# Altium PCB 844-XXXXX_FAB_NEO-M9N_MODULE.PcbDoc
Units mm, origin at the board's own origin, x right, y up, seen from the top; angles counter-clockwise.
Board outline 67.18 x 31.75 mm, 4 copper layers (L01-Top Layer, L02-Inner Layer, L03-Inner Layer, L04-Bottom Layer), stack 1.555 mm thick; 33 components, 25 nets, 85 pads, 211 vias.
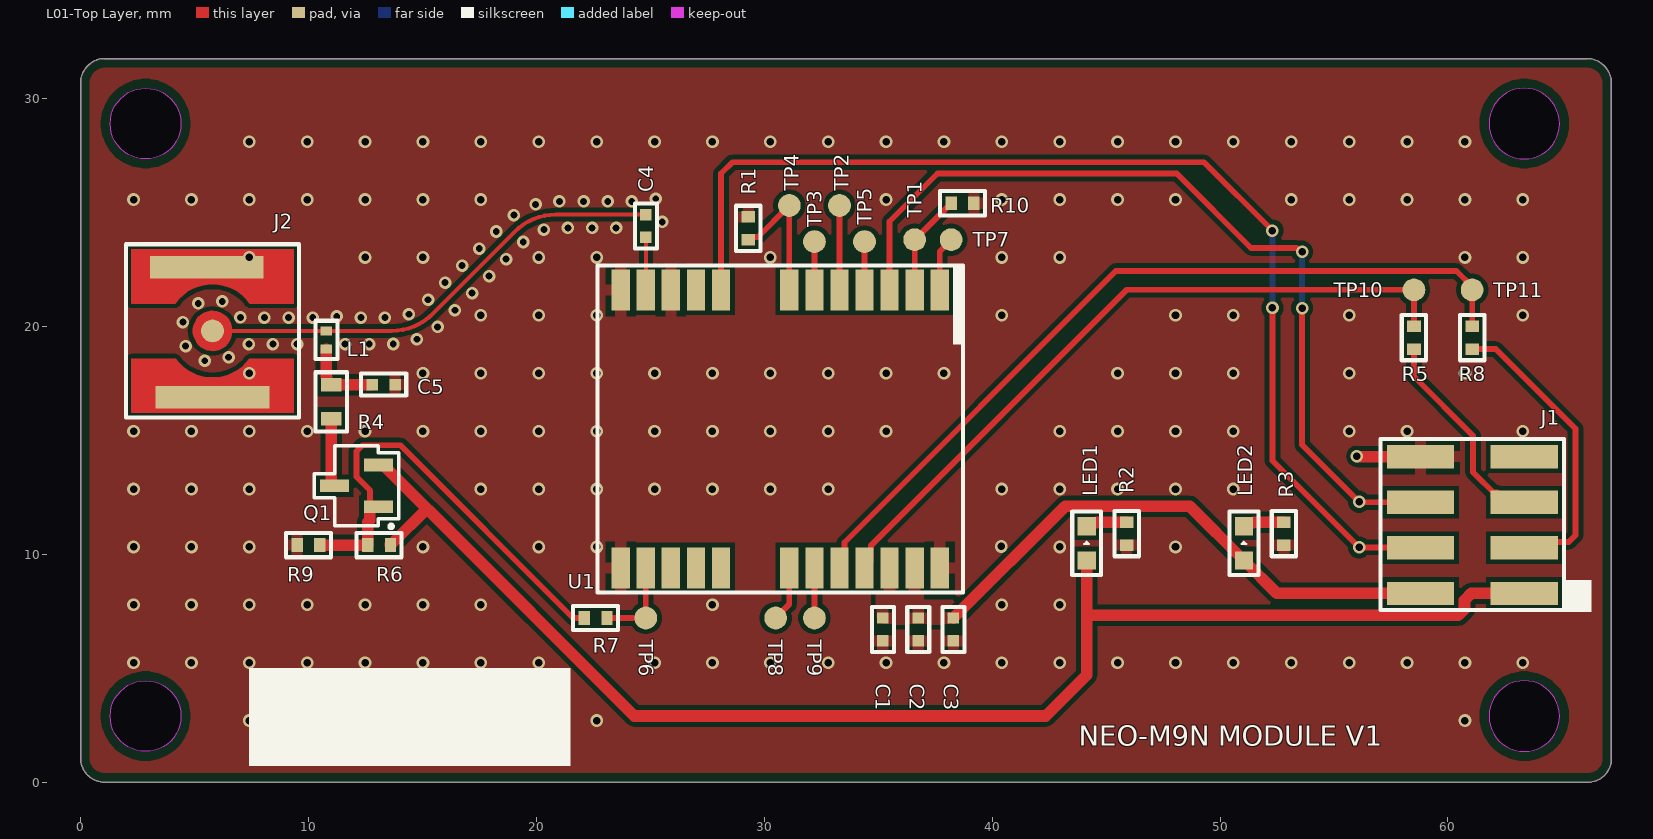
[diagram p0: L01-Top Layer view]
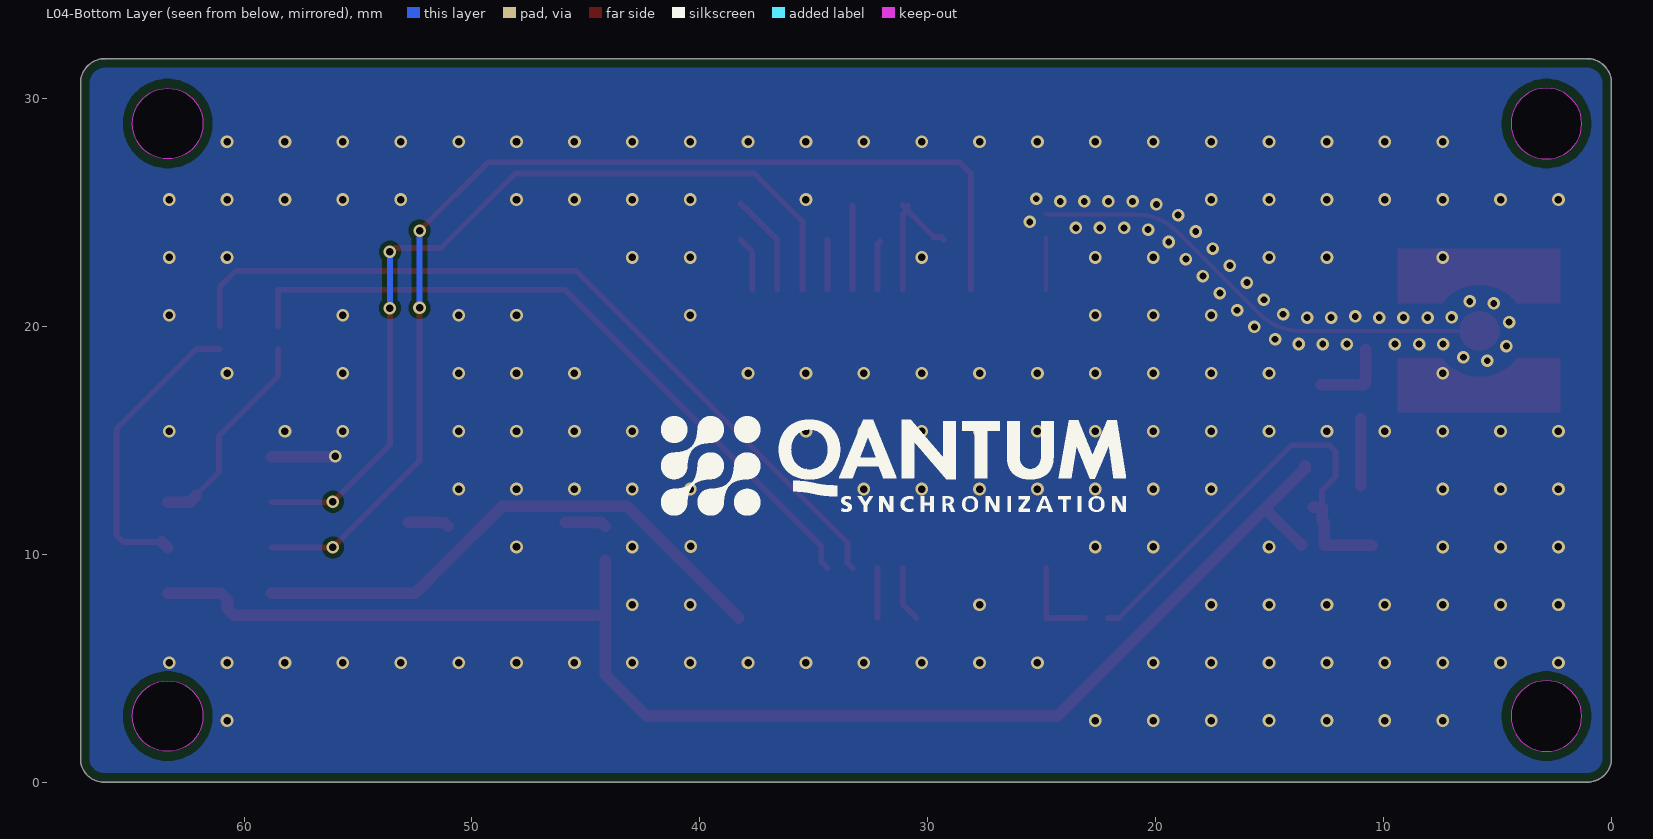
[diagram p1: L04-Bottom Layer view, seen from below]
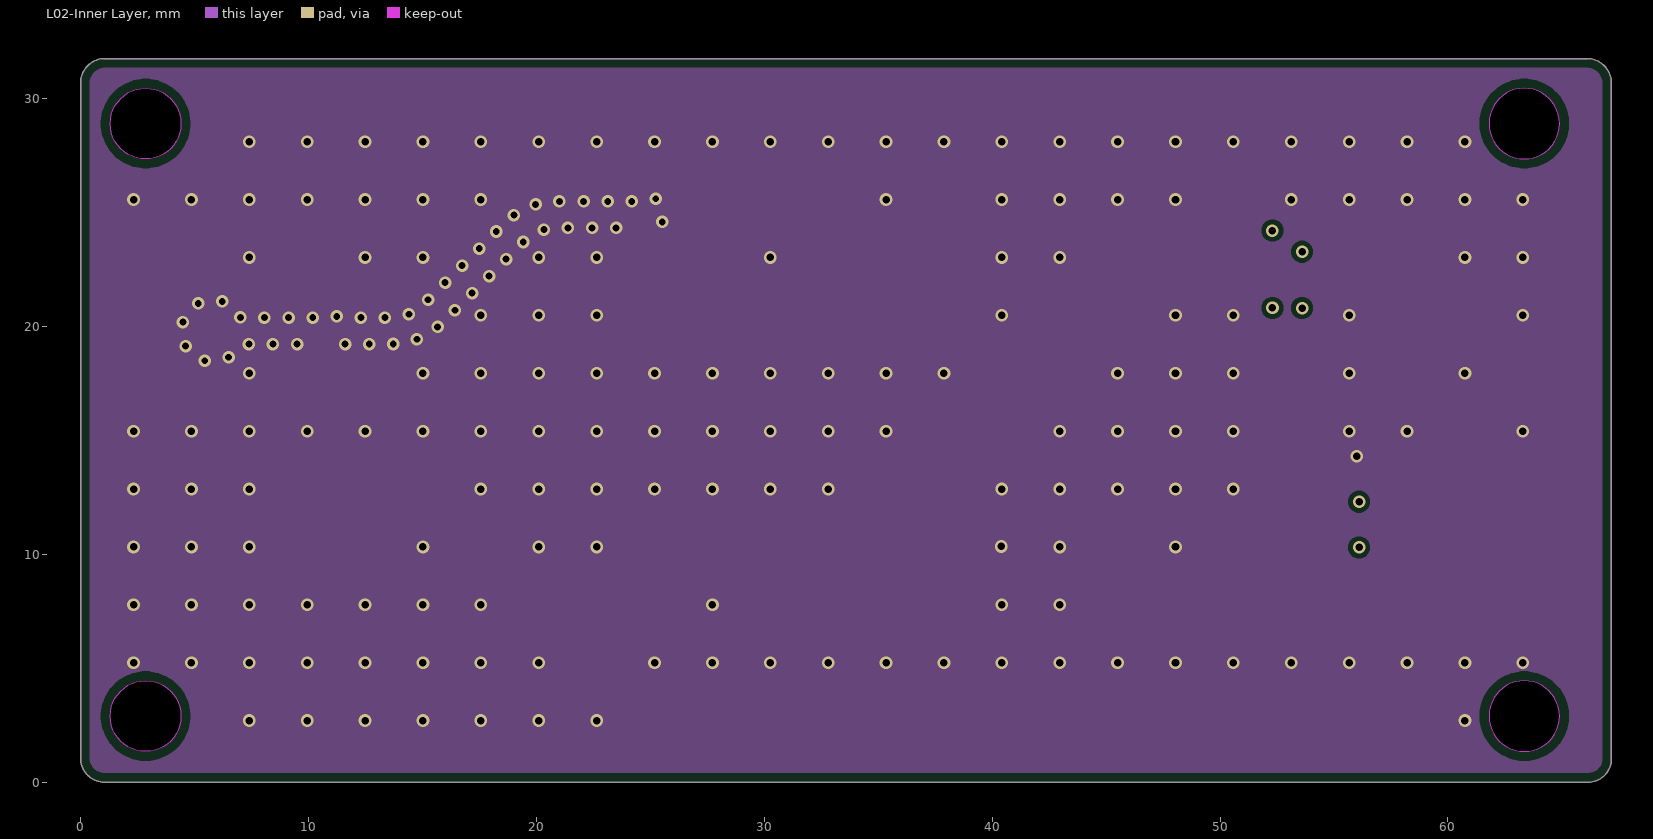
[diagram p2: L02-Inner Layer]
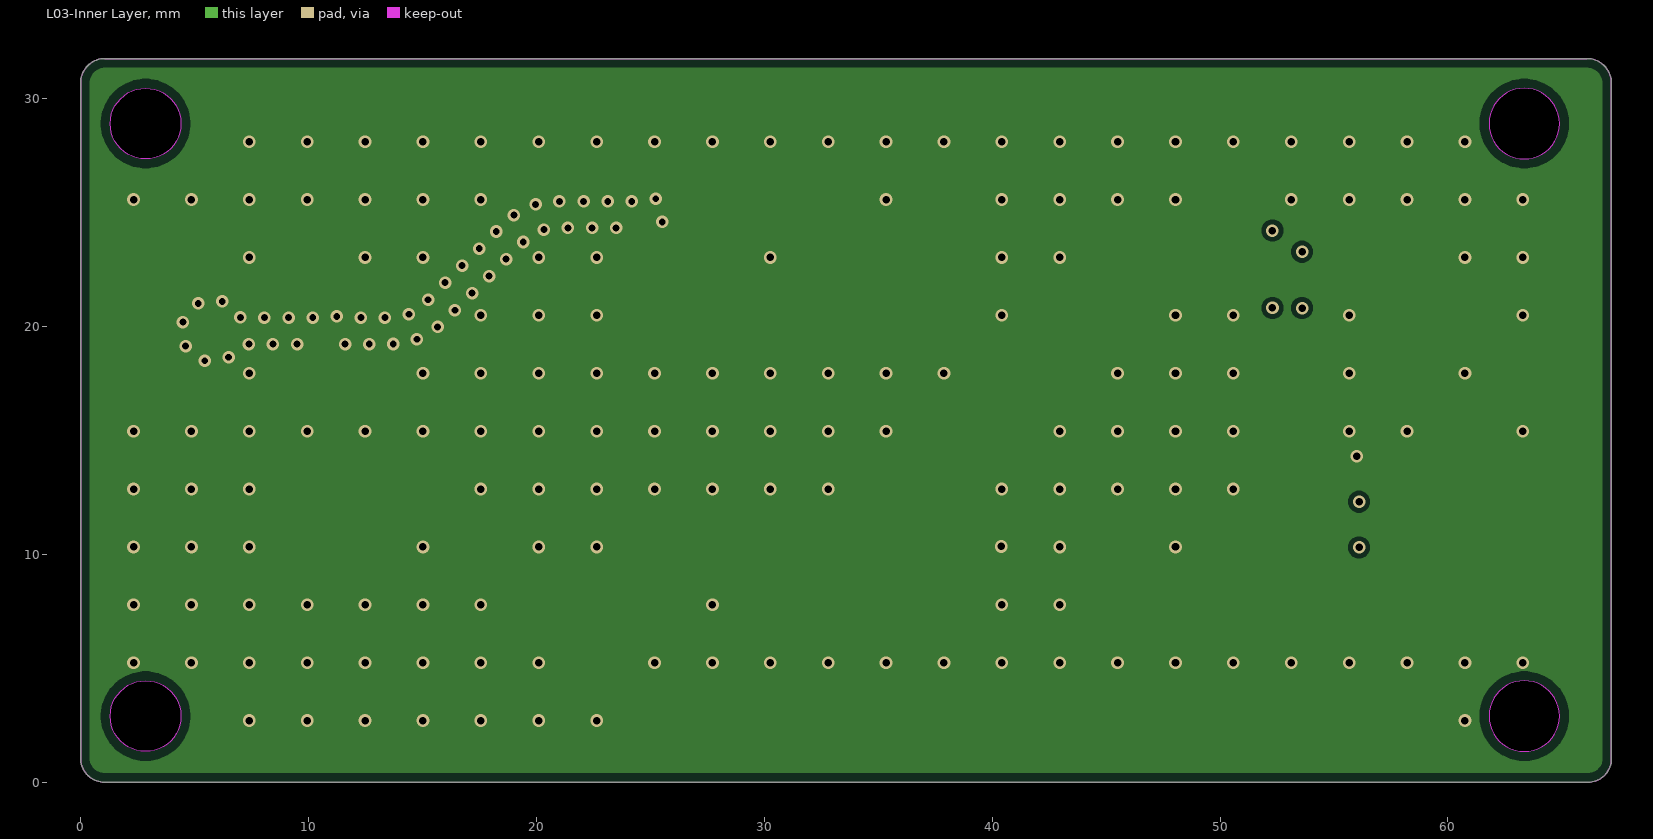
[diagram p3: L03-Inner Layer]
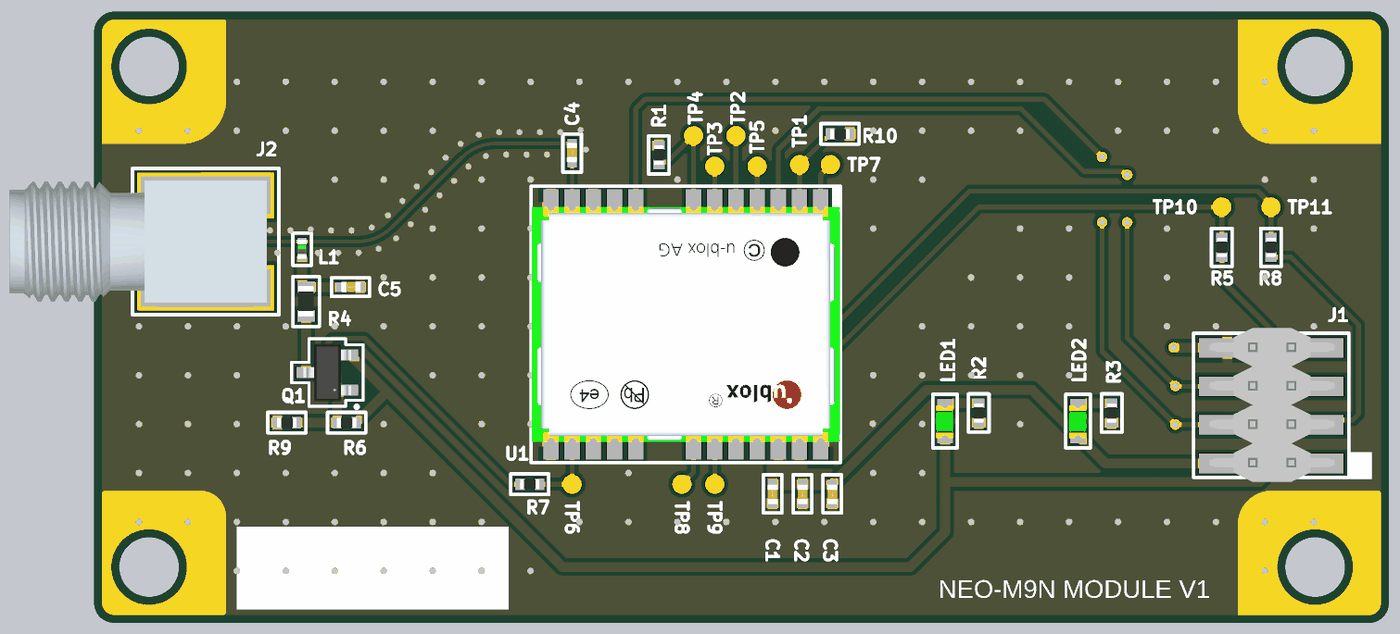
[diagram p4: 3D render of the assembled board from above, using the file's embedded part models]

## Layer stack, top to bottom
Top Solder: solder mask 0.0152, Solder Resist, Dk 3.9
L01-Top Layer: signal copper 0.0457
Dielectric 1: prepreg 0.1046, 2x106, Dk 3.7
L02-Inner Layer: signal copper 0.0305
Dielectric 2: core 1.1938, FR4, Dk 4.04
L03-Inner Layer: signal copper 0.0305
Dielectric 3: prepreg 0.1046, 2x106, Dk 3.7
L04-Bottom Layer: signal copper 0.0457
Bottom Solder: solder mask 0.0152, Solder Resist, Dk 3.9

## Board outline
1.045,0 cw(c1.045,1.045) 0,1.045 -0.002,30.676 cw(c1.069,30.676) 1.068,31.747 66.094,31.749 cw(c66.094,30.669) 67.174,30.67 67.171,1.015 cw(c66.152,1.015) 66.153,-0.004
cut-out: 61.801,2.896 ccw(c63.351,2.896) 63.351,1.346 ccw(c63.351,2.896) 64.901,2.896 ccw(c63.351,2.896) 63.351,4.446 ccw(c63.351,2.896)
cut-out: 1.301,2.896 cw(c2.851,2.896) 2.851,4.446 cw(c2.851,2.896) 4.401,2.896 cw(c2.851,2.896) 2.851,1.346 cw(c2.851,2.896)
cut-out: 61.801,28.896 ccw(c63.351,28.896) 63.351,27.346 ccw(c63.351,28.896) 64.901,28.896 ccw(c63.351,28.896) 63.351,30.446 ccw(c63.351,28.896)
cut-out: 2.851,27.346 cw(c2.851,28.896) 1.301,28.896 cw(c2.851,28.896) 2.851,30.446 cw(c2.851,28.896) 4.401,28.896 cw(c2.851,28.896)

## Design rules (kind name [scope] priority, off if disabled: settings)
AcuteAngle [All] p1: minimum=6.00000000000000E+0001 checktracksonly=FALSE
BoardOutlineClearance [All] p1: gap=0.4 ignorepadtopadclearanceinfootprint=FALSE
Clearance Clearance_L1andL4_Copper [(InPolygon AND (OnLayer('Top Layer') OR OnLayer('Bottom Layer'))) vs (InDifferentialPairClass('All Differential Pairs'))] p1: gap=0.2 ignorepadtopadclearanceinfootprint=FALSE except(0.3: Arc-Hole Track-Hole SMDPad-Hole THPad-Hole Via-Hole Fill-Hole Poly-Hole Region-Hole Text-Hole; 0.5: Arc-Fill Arc-Poly Arc-Region Track-Fill Track-Poly Track-Region SMDPad-Fill SMDPad-Poly SMDPad-Region THPad-Fill THPad-Poly THPad-Region Via-Fill Via-Poly Via-Region Fill-Fill Fill-Poly Fill-Region Poly-Poly Poly-Region Region-Region)
Clearance [All] p2: gap=0.2 ignorepadtopadclearanceinfootprint=FALSE
ComponentClearance [All] p1: gap=0.4 collisioncheckmode=3 verticalgap=0.5 showdistances=FALSE
DiffPairsRouting 90_Ohm_L1andL4 [InDifferentialPairClass('90_Ohm')] p1: maxlimit=0.254 minlimit=0.14 mostfreqgap=0.254 toplayer_maxgap=0.14 toplayer_prefgap=0.14 toplayer_minwidth=0.114 toplayer_maxwidth=0.114 toplayer_prefwidth=0.114 midlayer1_mingap=0.254 midlayer1_minwidth=0.381 midlayer1_maxwidth=0.381 midlayer1_prefwidth=0.381 midlayer2_mingap=0.254 midlayer2_minwidth=0.381 midlayer2_maxwidth=0.381 midlayer2_prefwidth=0.381 bottomlayer_maxgap=0.14 bottomlayer_prefgap=0.14 bottomlayer_minwidth=0.114 bottomlayer_maxwidth=0.114 bottomlayer_prefwidth=0.114 maxuncoupledlength=5.08
DiffPairsRouting 100_Ohm_L1andL4 [InDifferentialPairClass('100_Ohm')] p2: maxlimit=0.254 minlimit=0.241 mostfreqgap=0.254 toplayer_maxgap=0.241 toplayer_prefgap=0.241 toplayer_minwidth=0.114 toplayer_maxwidth=0.114 toplayer_prefwidth=0.114 midlayer1_mingap=0.254 midlayer1_minwidth=0.381 midlayer1_maxwidth=0.381 midlayer1_prefwidth=0.381 midlayer2_mingap=0.254 midlayer2_minwidth=0.381 midlayer2_maxwidth=0.381 midlayer2_prefwidth=0.381 bottomlayer_maxgap=0.241 bottomlayer_prefgap=0.241 bottomlayer_minwidth=0.114 bottomlayer_maxwidth=0.114 bottomlayer_prefwidth=0.114 maxuncoupledlength=5.08
DiffPairsRouting 100_Ohm_Default [All] p3: maxlimit=0.254 minlimit=0.241 mostfreqgap=0.254 toplayer_maxgap=0.241 toplayer_prefgap=0.241 toplayer_minwidth=0.114 toplayer_maxwidth=0.114 toplayer_prefwidth=0.114 midlayer1_mingap=0.254 midlayer1_minwidth=0.381 midlayer1_maxwidth=0.381 midlayer1_prefwidth=0.381 midlayer2_mingap=0.254 midlayer2_minwidth=0.381 midlayer2_maxwidth=0.381 midlayer2_prefwidth=0.381 bottomlayer_maxgap=0.241 bottomlayer_prefgap=0.241 bottomlayer_minwidth=0.114 bottomlayer_maxwidth=0.114 bottomlayer_prefwidth=0.114 maxuncoupledlength=5.08
HoleSize [All] p1: absolutevalues=TRUE maxlimit=3 minlimit=0.15 maxpercent=80.000 minpercent=20.000
HoleToHoleClearance [All] p1: gap=0.3 allowstackedmicrovias=TRUE
MatchedLengths [InDifferentialPairClass('All Differential Pairs')] p1: tolerance=0.025 checknetsindiffpair=TRUE checkdiffpairvsdiffpair=FALSE checkxsignals=FALSE checkothers=FALSE
MinimumSolderMaskSliver [All] p1: minsoldermaskwidth=0.1 // 0.076mm for Green Soldermask, 0.1 for other color soldermask
PlaneClearance [All] p1: clearance=0.254
PolygonConnect [All] p1: thpad.connectstyle=Relief thpad.reliefconductorwidth=0.508 thpad.reliefentries=4 thpad.polygonreliefangle="90 Angle" thpad.airgapwidth=0.254 smdpad.connectstyle=Relief smdpad.reliefconductorwidth=0.508 smdpad.reliefentries=4 smdpad.polygonreliefangle="90 Angle" smdpad.airgapwidth=0.254 via.connectstyle=Direct via.reliefconductorwidth=0.254 via.reliefentries=4 via.polygonreliefangle="90 Angle" via.airgapwidth=0.254
RoutingCorners [All] p1: cornerstyle=45-Degree minsetback=2.5 maxsetback=2.5
RoutingVias [All] p1: holewidth=0.2 width=0.4 viastyle="Through Hole" minholewidth=0.15 minwidth=0.35 maxholewidth=0.3 maxwidth=0.6
SilkToSilkClearance [All] p1: silktosilkclearance=0.1
SilkToSolderMaskClearance [IsPad] p1: minsilkscreentomaskgap=1 clearancetoexposedcopper=TRUE
SolderMaskExpansion [All] p1: expansion=0.05 istentingtop=FALSE
UnRoutedNet [All] p1: checkbadconnections=TRUE
Width Width_PWR [InNetClass('PWR')] p1: maxlimit=0.5 minlimit=0.2 preferedwidth=0.3 minimp=50.000000 maximp=50.000000 favimp=50.000000
Width Width_GND [InNetClass('GND')] p2: maxlimit=0.5 minlimit=0.2 preferedwidth=0.3 minimp=50.000000 maximp=50.000000 favimp=50.000000
20 further rules are at their usual default settings.

## Components (designator, comment, footprint, x,y, rotation, side; value= is the part's Value field where it differs from the comment)
C1 "1uF 6V3 0402" c0402 35.2,6.7 r90 top
C2 "100nF 10V 0402" c0402 36.756,6.7 r90 top
C3 "10nF 50V 0402" c0402 38.299,6.7 r90 top
C4 "47pF 50V 0402" c0402 24.801,24.4 r270 top
C5 "10nF 50V 0402" c0402 13.3,17.438 r180 top
J1 "NRPN042MAMS-RC 2MM" CONN_NRPN042MAMS-RC 63.345,8.28 r180 top locked
J2 "SMB_131-3711-301" CONN_131-3711-301 5.79,19.8 r270 top locked
L1 "27nH 300mA 460mohm 0402" L0402 10.788,19.4 r90 top
LED1 "Green" led0603 44.149,10.475 r90 top
LED2 "Green" led0603 51.049,10.475 r90 top
Q1 "DMG2302UKQ-7" SOT23 12.1,13 r90 top
R1 "0 ohm 0402" r0402 29.3,24.3 r90 top
R2 "10K 1/8W 0402" r0402 45.9,10.9 r90 top
R3 "10K 1/8W 0402" r0402 52.8,10.9 r90 top
R4 "10 OHM 1/4W 0603" r0603 11,16.688 r90 top
R5 "0 ohm 0402" r0402 58.506,19.5 r270 top
R6 "0 ohm 0402" r0402 13.1,10.4 r0 top
R7 "0 ohm 0402" r0402 22.6,7.2 r180 top
R8 "0 ohm 0402" r0402 61.061,19.5 r270 top
R9 "0 ohm 0402" r0402 10,10.4 r180 top
R10 "0 ohm 0402" r0402 38.7,25.4 r180 top
TP1 "1MM" TP1MM 36.6,23.8 r0 top
TP2 "1MM" TP1MM 33.3,25.3 r0 top
TP3 "1MM" TP1MM 32.2,23.715 r0 top
TP4 "1MM" TP1MM 31.1,25.3 r0 top
TP5 "1MM" TP1MM 34.4,23.715 r0 top
TP6 "1MM" TP1MM 24.8,7.2 r0 top
TP7 "1MM" TP1MM 38.2,23.8 r0 top
TP8 "1MM" TP1MM 30.5,7.2 r0 top
TP9 "1MM" TP1MM 32.2,7.2 r0 top
TP10 "1MM" TP1MM 58.506,21.6 r90 top
TP11 "1MM" TP1MM 61.061,21.6 r90 top
U1 "NEO-M9N-00B" IC_NEO-M9N 30.7,15.5 r90 top

## Footprints (in the part's own frame and the unit in brackets; to place one, negate y for a bottom-side part, rotate by r counter-clockwise, add the part's x,y. Pads: shape width x height; smd on the part's side, far side on the other; paste and mask are expansions set on the pad)
c0402 [mm]
  rect 0.5x0.5 smd: 1(-0.5,0) 2(0.5,0)
  silkscreen extent -0.99,-0.48 0.99,0.48, body extent -0.55,-0.28 0.5,0.27, height 0.56
CONN_131-3711-301 [mm]
  round 1 smd mask+0: 1(0,0)
  rect 1x5 smd mask+0: 2(-2.794,-0.254) 3(2.916,0)
  L01-Top Layer circle w0.013: c0,0 r0.864
  L01-Top Layer region: 1.219,-3.556 3.581,-3.556 3.581,3.556 1.219,3.556 1.219,1.642 1.827,0.919 2.045,0 1.827,-0.918 1.219,-1.641 1.219,-1.641
  L01-Top Layer region: -3.581,-3.556 -1.219,-3.556 -1.219,-1.641 -1.827,-0.918 -2.045,0 -1.827,0.919 -1.219,1.642 -1.219,1.642 -1.219,3.556 -3.581,3.556
  L01-Top Layer region: -0.864,0 -0.798,-0.33 -0.611,-0.61 -0.33,-0.798 0,-0.863 0,-0.863 0.331,-0.798 0.611,-0.61 0.798,-0.33 0.864,0 0.864,0 0.798,0.331 0.611,0.611 0.331,0.798 0,0.864 0,0.864 -0.33,0.798 -0.611,0.611 -0.798,0.331 -0.864,0
  L01-Top Layer lines w0.013: 3.581,-3.556 1.219,-3.556 1.219,-1.641 ccw(c0,0) 1.219,1.642 1.219,3.556 3.581,3.556 3.581,-3.556 ; -1.219,-3.556 -3.581,-3.556 -3.581,3.556 -1.219,3.556 -1.219,1.642 ccw(c0,0) -1.219,-1.641 -1.219,-3.556
  silkscreen extent -3.8,-3.8 3.8,3.8, body extent -3.18,-10.16 3.18,3.18, height 8.27
CONN_NRPN042MAMS-RC [mm] "MALE_P2MM_8POS_2ROW"
  rect 2.95x1.02 smd: 1(0,0) 2(4.55,0) 3(0,-2) 4(4.55,-2) 5(0,-4) 6(4.55,-4) 7(0,-6) 8(4.55,-6)
  silkscreen extent -2.95,-6.77 6.3,0.81, body extent -1.02,-7.05 5.48,0.95, height 5.81
IC_NEO-M9N [mil]
  rect 70.8x31.5 smd paste-99999: 1(240.15,-275.55) 2(240.15,-232.25) 3(240.15,-188.95) 4(240.15,-145.65) 5(240.15,-102.35) 6(240.15,-59.05) 7(240.15,-15.75) 8(240.15,102.35) 9(240.15,145.65) 10(240.15,188.95) 11(240.15,232.25) 12(240.15,275.55) 13(-240.15,275.55) 14(-240.15,232.25) 15(-240.15,188.95) 16(-240.15,145.65) 17(-240.15,102.35) 18(-240.15,-15.75) 19(-240.15,-59.05) 20(-240.15,-102.35) 21(-240.15,-145.65) 22(-240.15,-188.95) 23(-240.15,-232.25) 24(-240.15,-275.55)
  silkscreen extent -282,-316 282,316, body extent -240,-315 240,315, height 91
L0402 [mm]
  rect 0.4x0.5 smd: 1(-0.4,0) 2(0.4,0)
  silkscreen extent -0.83,-0.49 0.84,0.48, body extent -0.5,-0.25 0.5,0.25, height 0.56
led0603 [mm]
  rect 0.8x0.8 smd: 1(-0.75,0) 2(0.75,0)
  silkscreen extent -1.4,-0.64 1.4,0.64, body extent -0.88,-0.44 0.82,0.46, height 0.9
r0402 [mm]
  rect 0.5x0.6 smd: 1(-0.5,0) 2(0.5,0)
  silkscreen extent -0.99,-0.53 0.99,0.53, body extent -0.5,-0.25 0.5,0.25, height 0.36
r0603 [mm]
  rect 0.6x0.9 smd: 1(-0.75,0) 2(0.75,0)
  silkscreen extent -1.3,-0.69 1.3,0.69, body extent -0.79,-0.4 0.81,0.4, height 0.46
SOT23 [mil]
  rect 22x50 smd: 1(-36.02,-38) 2(36.02,-38) 3(0,38)
  silkscreen extent -73,-73 69,73, body extent -59,-49 59,49, height 43
TP1MM [mm] "Test Point 1MM diameter"
  round 1 smd paste-100: 1(0,0)

## Part data
C1: library part "CAP CER 1UF 6.3V X7R 0402", "0402 1 uF 6.3 V ±10% Tolerance X7R Multilayer Ceramic Capacitor", Capacitance=1uF, Case Code (Imperial)=0402, Case Code (Metric)=1005, Dielectric=X7R, Manufacturer=Murata, Manufacturer Part Number=GRM155R70J105KA12J, Max Operating Temperature=125°C, Min Operating Temperature=-55°C, Package Quantity=50000, Supplier Part Number 1=490-13339-1-ND, Tolerance=10%, Voltage Rating=6.3V, Case/Package=0402, CATEGORY="Ceramic Capacitors", ComponentLink1Description=http://www.mouser.com/ds/2/281/c02e-2905.pdf?src-supplier=Mouser, ComponentLink1URL=http://www.mouser.com/ds/2/281/c02e-2905.pdf?src-supplier=Mouser, ComponentLink2Description=http://search.murata.co.jp/Ceramy/image/img/A01X/G101/ENG/GRM155R70J105KA12-01.pdf?src-supplier=Digi-Key, ComponentLink2URL=http://search.murata.co.jp/Ceramy/image/img/A01X/G101/ENG/GRM155R70J105KA12-01.pdf?src-supplier=Digi-Key, Length=0.039inch, Mount="Surface Mount", Packaging="Tape and Reel", Pricing 1="1=0.10000, 10=0.07300, 50=0.04000, 100=0.03270, 500=0.02334, 1000=0.01833, 2500=0.01666, 5000=0.01533 (USD)", RoHS=Yes, RoHS Compliant=Yes, Stock 1=7275801, Supplier 1=Digi-Key, Termination=SMD/SMT, Thickness=0.022inch, Voltage Rating (DC)=6.3V, Weight=0.000212oz, Width=0.02inch
C2: library part "CAP CER 0.1UF 10V X7R 0402", "CL05 Series 0.1 uF 10 V ±10 % Tolerance X7R SMT Multilayer Ceramic Capacitor", Capacitance=100nF, Case Code (Imperial)=0402, Case Code (Metric)=1005, Dielectric=X7R, Manufacturer=Samsung, Manufacturer Part Number=CL05B104KP5NNNC, Max Operating Temperature=125°C, Min Operating Temperature=-55°C, Package Quantity=1, Supplier Part Number 1=1276-1002-1-ND, Tolerance=10%, Voltage Rating=10V, Case/Package=0402, CATEGORY="Ceramic Capacitors", ComponentLink1Description=https://datasheet.ciiva.com/15165/getdatasheetpartid-37100-15165107.pdf?src-supplier=Verical, ComponentLink1URL=https://datasheet.ciiva.com/15165/getdatasheetpartid-37100-15165107.pdf?src-supplier=Verical, ComponentLink2Description=https://datasheet.ciiva.com/16498/cl05b104kq5nnnc-16498491.pdf?src-supplier=Future+Electronics, ComponentLink2URL=https://datasheet.ciiva.com/16498/cl05b104kq5nnnc-16498491.pdf?src-supplier=Future+Electronics, Construction=Flat, Contact Plating=Tin, Depth=0.5mm, Height=0.5mm, Length=1mm, Mount="Surface Mount", Packaging="Tape and Reel", Pricing 1="1=0.10000, 10=0.02400, 50=0.01300, 100=0.01050, 500=0.00752, 1000=0.00592, 2500=0.00538, 5000=0.00495 (USD)", Radiation Hardening=No, RoHS=Yes, RoHS Compliant=Yes, Series=CL, Stock 1=36338332, Supplier 1=Digi-Key, Thickness=0.022inch, Width=0.02inch
C3 C5: library part "CAP CER 10000PF 50V X7R 0402", "CAP CER 10000PF 50V X7R 0402", Capacitance=10nF, Case Code (Imperial)=0402, Case Code (Metric)=1005, Dielectric=X7R, Manufacturer=Murata, Manufacturer Part Number=GCM155R71H103KA55D, Max Operating Temperature=125°C, Min Operating Temperature=-55°C, Package Quantity=1, Ratings=AEC-Q200, Supplier Part Number 1=490-4762-1-ND, Tolerance=10%, Voltage=50V, Case/Package=0402, CATEGORY="Ceramic Capacitors", ComponentLink1Description=https://datasheet.ciiva.com/130/product-130683.pdf?src-supplier=Digi-Key, ComponentLink1URL=https://datasheet.ciiva.com/130/product-130683.pdf?src-supplier=Digi-Key, ComponentLink2Description=https://datasheet.ciiva.com/130/product-130682.pdf?src-supplier=Digi-Key, ComponentLink2URL=https://datasheet.ciiva.com/130/product-130682.pdf?src-supplier=Digi-Key, ComponentLink3Description=https://datasheet.ciiva.com/130/product-130684.pdf?src-supplier=Digi-Key, ComponentLink3URL=https://datasheet.ciiva.com/130/product-130684.pdf?src-supplier=Digi-Key, ComponentLink4Description=https://datasheet.ciiva.com/11787/0900766b80ef92d0-11787082.pdf?src-supplier=RSComponents, ComponentLink4URL=https://datasheet.ciiva.com/11787/0900766b80ef92d0-11787082.pdf?src-supplier=RSComponents, ComponentLink5Description=https://datasheet.ciiva.com/16199/product-16199584.pdf?src-supplier=Future+Electronics, ComponentLink5URL=https://datasheet.ciiva.com/16199/product-16199584.pdf?src-supplier=Future+Electronics, ComponentLink6Description=https://datasheet.ciiva.com/18100/getdatasheetpartid-27433-18100656.pdf?src-supplier=Verical, ComponentLink6URL=https://datasheet.ciiva.com/18100/getdatasheetpartid-27433-18100656.pdf?src-supplier=Verical, ComponentLink7Description=https://datasheet.ciiva.com/2989/product-2989235.pdf?src-supplier=Avnet, ComponentLink7URL=https://datasheet.ciiva.com/2989/product-2989235.pdf?src-supplier=Avnet, Construction=Flat, Depth=0.5mm, Height=0.5mm, Lead Free="Lead Free", Length=1mm, Mount="Surface Mount", Packaging="Tape and Reel", Pricing 1="1=0.10000, 10=0.02700, 50=0.01460, 100=0.01190, 500=0.00848, 1000=0.00667, 2500=0.00606, 5000=0.00558 (USD)", Radiation Hardening=No, REACH SVHC="No SVHC", RoHS=Yes, RoHS Compliant=Yes, Series=GCM, Stock 1=16109194, Supplier 1=Digi-Key, Termination=SMD/SMT, Thickness=0.022inch, Voltage Rating=50V, Voltage Rating (DC)=50V, Width=0.02inch
C4: library part "CAP CER 47PF 50V C0G/NPO 0402", "0402 47 pF 50 V ±5 % Tolerance NP0 SMT Multilayer Ceramic Capacitor", Capacitance=47pF, Case Code (Imperial)=0402, Case Code (Metric)=1005, Dielectric=C0G, Dielectric Material=Ceramic, Insulation Resistance=100GR, Manufacturer=Yageo, Manufacturer Part Number=CC0402JRNPO9BN470, Max Operating Temperature=125°C, Min Operating Temperature=-55°C, Package Quantity=1, Supplier Part Number 1=311-1021-1-ND, Tolerance=5%, Voltage=50V, Case/Package=0402, CATEGORY="Ceramic Capacitors", ComponentLink1Description=https://datasheet.ciiva.com/28450/1443161-28450267.pdf?src-supplier=Element14, ComponentLink1URL=https://datasheet.ciiva.com/28450/1443161-28450267.pdf?src-supplier=Element14, ComponentLink2Description=https://datasheet.ciiva.com/8033/1443161-8033638.pdf?src-supplier=Element14, ComponentLink2URL=https://datasheet.ciiva.com/8033/1443161-8033638.pdf?src-supplier=Element14, ComponentLink3Description=https://datasheet.ciiva.com/8033/1443161-8033637.pdf?src-supplier=Element14, ComponentLink3URL=https://datasheet.ciiva.com/8033/1443161-8033637.pdf?src-supplier=Element14, ComponentLink4Description=https://datasheet.ciiva.com/161/mlccorderingcode-161493.pdf?src-supplier=Digi-Key, ComponentLink4URL=https://datasheet.ciiva.com/161/mlccorderingcode-161493.pdf?src-supplier=Digi-Key, ComponentLink5Description=https://datasheet.ciiva.com/161/mlccorderingcode-161492.pdf?src-supplier=Digi-Key, ComponentLink5URL=https://datasheet.ciiva.com/161/mlccorderingcode-161492.pdf?src-supplier=Digi-Key, ComponentLink6Description=https://datasheet.ciiva.com/161/mlccorderingcode-161494.pdf?src-supplier=Digi-Key, ComponentLink6URL=https://datasheet.ciiva.com/161/mlccorderingcode-161494.pdf?src-supplier=Digi-Key, Depth=0.5mm, Height=0.5mm, Lead Free="Lead Free", Length=1mm, Mount="Surface Mount", Number of Pins=2, Packaging="Tape and Reel", Pricing 1="1=0.10000, 10=0.01800, 50=0.01000, 100=0.00820, 500=0.00584, 1000=0.00458, 2500=0.00417, 5000=0.00383 (USD)", Radiation Hardening=No, REACH SVHC="No SVHC", Resistor Type=Ceramic, RoHS=Yes, RoHS Compliant=Yes, Series=CC, Stock 1=4278982, Supplier 1=Digi-Key, Termination=SMD/SMT, Thickness=0.022inch, Voltage Rating=50V, Voltage Rating (DC)=50V, Weight=2.3E-05oz, Width=0.02inch
J1: library part CONN_NRPN042MAMS-RC, "Dual Row 8 Position 2 mm Pitch Surface Mount Header", Color=Black, Manufacturer=Sullins, Manufacturer Part Number=NRPN042MAMS-RC, Package Quantity=1000, Supplier Part Number 1=S6009-04-ND, CATEGORY=Connectors, ComponentLink1Description=https://datasheet.ciiva.com/711/nrpnxx2mamx-rc-10495-d-711179.pdf?src-supplier=Digi-Key, ComponentLink1URL=https://datasheet.ciiva.com/711/nrpnxx2mamx-rc-10495-d-711179.pdf?src-supplier=Digi-Key, Connector Type="Male Pin", Contact Material=Brass, Contact Mating Length=0.141inch, Contact Plating=Gold, Contact Type="Male Pin", Height=1.5mm, Housing Material=Nylon, Lead Free="Lead Free", Length=8mm, Mount="Surface Mount", Number of Positions=8, Number of Rows=2, Packaging=Bulk, Pitch=0.079inch, Pricing 1="1=0.76000, 76=0.60237, 152=0.57618, 456=0.47143, 988=0.41904, 4940=0.37830 (USD)", RoHS=Yes, RoHS Compliant=Yes, Row Spacing=0.079inch, Stock 1=10801, Supplier 1=Digi-Key, Termination=Solder, Width=4mm
J2: library part CONN_131-3711-301, "Rf Coaxial Board Mount Connector", Case/Package=SMA, Dielectric Material=PTFE, Frequency=4Hz, Housing Color=Gold, Manufacturer="Bel Cinch", Manufacturer Part Number=131-3711-301, Max Frequency=4GHz, Max Operating Temperature=165°C, Min Operating Temperature=-65°C, Operating Frequency="0 to 4 Hz to GHz", Package Quantity=25, Supplier Part Number 1=J10507-ND, Voltage Rating=335V, Body Material=Brass, Body Plating=Gold, CATEGORY="RF / Coaxial Connectors", Center Contact Plating=Gold, ComponentLink1Description=http://www.mouser.com/Search/include/RoHSCompliant.aspx?qs=sxnx5FoGSWlI%252bs7K%252boh9Yg%3d%3d&src-supplier=Mouser, ComponentLink1URL=http://www.mouser.com/Search/include/RoHSCompliant.aspx?qs=sxnx5FoGSWlI%252bs7K%252boh9Yg%3d%3d&src-supplier=Mouser, ComponentLink2Description=http://www.mouser.com/Search/include/RoHSCompliant.aspx?qs=BzWiDxlKIe%2fRhe5ZDRBb2Q%3d%3d&src-supplier=Mouser, ComponentLink2URL=http://www.mouser.com/Search/include/RoHSCompliant.aspx?qs=BzWiDxlKIe%2fRhe5ZDRBb2Q%3d%3d&src-supplier=Mouser, ComponentLink3Description=http://www.onlinecomponents.com/datasheet/1313711301.aspx?p=11276490&src-supplier=Onlinecomponents.com, ComponentLink3URL=http://www.onlinecomponents.com/datasheet/1313711301.aspx?p=11276490&src-supplier=Onlinecomponents.com, ComponentLink4Description=http://www.mouser.com/Search/include/RoHSCompliant.aspx?qs=sxnx5FoGSWlgU0HI%252bkNgTA%3d%3d&src-supplier=Mouser, ComponentLink4URL=http://www.mouser.com/Search/include/RoHSCompliant.aspx?qs=sxnx5FoGSWlgU0HI%252bkNgTA%3d%3d&src-supplier=Mouser, ComponentLink5Description=http://www.mouser.com/Search/include/RoHSCompliant.aspx?qs=p2XSgoD%252b2ikka7OcbAcBow%3d%3d&src-supplier=Mouser, ComponentLink5URL=http://www.mouser.com/Search/include/RoHSCompliant.aspx?qs=p2XSgoD%252b2ikka7OcbAcBow%3d%3d&src-supplier=Mouser, ComponentLink6Description=http://www.mouser.com/Search/include/RoHSCompliant.aspx?qs=CoHYZihNMM5AOHZHjTCMkA%3d%3d&src-supplier=Mouser, ComponentLink6URL=http://www.mouser.com/Search/include/RoHSCompliant.aspx?qs=CoHYZihNMM5AOHZHjTCMkA%3d%3d&src-supplier=Mouser, ComponentLink7Description=http://www.mouser.com/Search/include/RoHSCompliant.aspx?qs=hJAXt0VUbWsyDbF0CdNvSg%3d%3d&src-supplier=Mouser, ComponentLink7URL=http://www.mouser.com/Search/include/RoHSCompliant.aspx?qs=hJAXt0VUbWsyDbF0CdNvSg%3d%3d&src-supplier=Mouser, Connector Type="SMB,Male Pin", Contact Material=Brass, Contact Plating=Gold,Nickel, Fastening Type=SNAP-ON, Gender=Female, Impedance=50R, Mount="Surface Mount", Orientation="Right Angle", Packaging=Bulk, Plating=Nickel, Polarity=Reverse, Pricing 1="1=7.75000, 10=7.00900, 25=6.62160, 50=6.46000, 100=6.13700, 250=5.49100, 500=5.16800, 1000=4.52200 (USD)", RoHS=Yes, Shell Plating=Nickel, Stock 1=475, Supplier 1=Digi-Key, Termination=Solder
L1: library part "FIXED IND 27NH 350MA 460MOHM SMD", "Inductor RF Chip Multi-Layer 27nH 5% 100MHz 8Q-Factor Air 300mA 460mOhm DCR 0402 Paper T/R", Case Code (Imperial)=0402, Case Code (Metric)=1005, Current Rating=300mA, DC Resistance (DCR)=460mR, Inductance=27nH, Inductance Tolerance=5%, Manufacturer=Murata, Manufacturer Part Number=LQG15HS27NJ02D, Max Operating Temperature=125°C, Min Operating Temperature=-55°C, Package Quantity=10000, Self Resonant Frequency=1.7GHz, Supplier Part Number 1=490-2628-1-ND, Test Frequency=100MHz, Case/Package=0402, CATEGORY="Fixed Inductors", ComponentLink1Description=https://datasheet.ciiva.com/11799/0900766b80f10809-11799242.pdf?src-supplier=RSComponents, ComponentLink1URL=https://datasheet.ciiva.com/11799/0900766b80f10809-11799242.pdf?src-supplier=RSComponents, ComponentLink2Description=https://datasheet.ciiva.com/1038/l0075s0083lqg15hs-1038146.pdf?src-supplier=Digi-Key, ComponentLink2URL=https://datasheet.ciiva.com/1038/l0075s0083lqg15hs-1038146.pdf?src-supplier=Digi-Key, ComponentLink3Description=https://datasheet.ciiva.com/1038/l0075s0083lqg15hs-1038145.pdf?src-supplier=Digi-Key, ComponentLink3URL=https://datasheet.ciiva.com/1038/l0075s0083lqg15hs-1038145.pdf?src-supplier=Digi-Key, ComponentLink4Description=https://datasheet.ciiva.com/1038/l0075s0083lqg15hs-1038147.pdf?src-supplier=Digi-Key, ComponentLink4URL=https://datasheet.ciiva.com/1038/l0075s0083lqg15hs-1038147.pdf?src-supplier=Digi-Key, ComponentLink5Description=https://datasheet.ciiva.com/3082/l0075s0083lqg15hs-3082179.pdf?src-supplier=Avnet, ComponentLink5URL=https://datasheet.ciiva.com/3082/l0075s0083lqg15hs-3082179.pdf?src-supplier=Avnet, ComponentLink6Description=https://datasheet.ciiva.com/16360/l0075s0083lqg15hs-16360143.pdf?src-supplier=Future+Electronics, ComponentLink6URL=https://datasheet.ciiva.com/16360/l0075s0083lqg15hs-16360143.pdf?src-supplier=Future+Electronics, Core Material=Air, DC Current=300mA, Depth=0.55mm, Height=0.5mm, Height - Seated (Max)=0.022inch, Lead Free="Lead Free", Length=1mm, Max DC Current=300mA, Military Standard=Not, Mount="Surface Mount", Packaging="Tape and Reel", Pricing 1="1=0.10000, 10=0.05300, 25=0.04720, 50=0.04020, 100=0.03550, 250=0.03248, 500=0.02954, 1000=0.02482, 2500=0.02127 (USD)", Q Factor=8, Rated Current-Max=300mA, REACH SVHC="No SVHC", RoHS=Yes, RoHS Compliant=Yes, Series=LQG15HS, Shielding=Unshielded, Stock 1=819111, Supplier 1=Digi-Key, Termination=SMD/SMT, Tolerance=5%, Width=0.02inch
LED1 LED2: library part "LED GREEN CLEAR CHIP SMD", "LED High-Power Uni-Color Green 574nm 2-Pin Chip LED T/R", Case Code (Imperial)=0603, Case Code (Metric)=1608, Forward Current=30mA, Forward Voltage=2V, Lens Color=Colorless, Manufacturer="Vishay Lite-On", Manufacturer Part Number=LTST-C190KGKT, Max Operating Temperature=85°C, Min Operating Temperature=-55°C, Package Quantity=1, Power Dissipation=75mW, Reverse Voltage=5V, Supplier Part Number 1=160-1435-1-ND, Test Current=20mA, Case/Package=0603, CATEGORY=LEDs, Color=Green, ComponentLink1Description=https://datasheet.ciiva.com/11774/0900766b80dc02a8-11774060.pdf?src-supplier=RSComponents, ComponentLink1URL=https://datasheet.ciiva.com/11774/0900766b80dc02a8-11774060.pdf?src-supplier=RSComponents, ComponentLink2Description=https://datasheet.ciiva.com/12403/100-ltst-c190kgkt-63268-12403899.pdf?src-supplier=Mouser, ComponentLink2URL=https://datasheet.ciiva.com/12403/100-ltst-c190kgkt-63268-12403899.pdf?src-supplier=Mouser, ComponentLink3Description=https://datasheet.ciiva.com/15117/getdatasheetpartid-141494-15117731.pdf?src-supplier=Verical, ComponentLink3URL=https://datasheet.ciiva.com/15117/getdatasheetpartid-141494-15117731.pdf?src-supplier=Verical, ComponentLink4Description=https://datasheet.ciiva.com/2109/s-110-ltst-c190kgkt-2109989.pdf?src-supplier=Digi-Key, ComponentLink4URL=https://datasheet.ciiva.com/2109/s-110-ltst-c190kgkt-2109989.pdf?src-supplier=Digi-Key, ComponentLink5Description=https://datasheet.ciiva.com/2109/s-110-ltst-c190kgkt-2109988.pdf?src-supplier=Digi-Key, ComponentLink5URL=https://datasheet.ciiva.com/2109/s-110-ltst-c190kgkt-2109988.pdf?src-supplier=Digi-Key, ComponentLink6Description=https://datasheet.ciiva.com/2109/s-110-ltst-c190kgkt-2109990.pdf?src-supplier=Digi-Key, ComponentLink6URL=https://datasheet.ciiva.com/2109/s-110-ltst-c190kgkt-2109990.pdf?src-supplier=Digi-Key, Depth=0.8mm, Dominant Wavelength=571nm, Height=0.8mm, Illumination Color=Green, Lead Free="Lead Free", Length=1.6mm, Lens Style=Diffused,Colorless,Rectangular,Clear, Lens Transparency=Clear, Luminous Intensity=35mcd, Mount="Surface Mount", Number of Elements=1, Number of LEDs=1, Number of Pins=2, Packaging="Tape and Reel", Power Rating=75mW, Pricing 1="1=0.24000, 10=0.13200, 100=0.06110, 500=0.05640, 1000=0.04418, 2000=0.04324 (USD)", Radiation Hardening=No, RoHS=Yes, RoHS Compliant=Yes, Stock 1=1803324, Supplier 1=Digi-Key, Viewing Angle=130°, Wavelength=574nm, Width=0.8mm
Q1: "N-Channel 20 V 2.8A (Ta) 660mW (Ta) Surface Mount SOT-23-3", Case/Package=SOT-23, Continuous Drain Current (ID)=2.8A, Drain to Source Voltage (Vdss)=20V, Input Capacitance=130pF, Manufacturer=Diodes, Max Operating Temperature=150°C, Max Power Dissipation=660mW, Mfr_Name="Diodes Inc", Min Operating Temperature=-55°C, Supplier Part Number 1=31-DMG2302UKQ-7CT-ND, Copyright="Copyright (C) 2022 Ultra Librarian. All rights reserved.", Digi-Key_Part_Number_1=31-DMG2302UKQ-7TR-ND, Digi-Key_Part_Number_2=31-DMG2302UKQ-7CT-ND, Digi-Key_Part_Number_3=31-DMG2302UKQ-7DKR-ND, Manufacturer Part Number=DMG2302UKQ-7, Manufacturer_Part_Number=DMG2302UKQ-7, Mount="Surface Mount", Packaging="Tape and Reel", Pricing 1="1=0.48000, 10=0.36000, 100=0.22400, 500=0.15330, 1000=0.11792 (USD)", Rds On Max=90mR, RefDes=RefDes, RoHS=Yes, Stock 1=997695, Supplier 1=Digi-Key, Type=DEV
R1 R5 R6 R7 R8 R9 R10: library part "RES 0 OHM JUMPER 1/16W 0402", "RES SMD 0 OHM JUMPER 1/16W 0402", Case Code (Imperial)=0402, Case Code (Metric)=1005, Manufacturer=Yageo, Manufacturer Part Number=RC0402JR-070RL, Max Operating Temperature=155°C, Max Power Dissipation=63mW, Min Operating Temperature=-55°C, Package Quantity=1, Power Rating=62.5mW, Resistance=0mR, Resistance Tolerance=5%, Resistor Type="Thick Film", Supplier Part Number 1=311-0.0JRCT-ND, Temperature Coefficient=200ppm/°C, Voltage Rating=50V, Case/Package=0402, CATEGORY="Chip SMD Resistors", ComponentLink1Description=https://datasheet.ciiva.com/2452/pyu-rc0402-51-rohs-l-6-2452608.pdf?src-supplier=Digi-Key, ComponentLink1URL=https://datasheet.ciiva.com/2452/pyu-rc0402-51-rohs-l-6-2452608.pdf?src-supplier=Digi-Key, ComponentLink2Description=https://datasheet.ciiva.com/11808/0900766b80c66297-11808195.pdf?src-supplier=RSComponents, ComponentLink2URL=https://datasheet.ciiva.com/11808/0900766b80c66297-11808195.pdf?src-supplier=RSComponents, ComponentLink3Description=https://datasheet.ciiva.com/7983/1018594-7983535.pdf?src-supplier=Element14, ComponentLink3URL=https://datasheet.ciiva.com/7983/1018594-7983535.pdf?src-supplier=Element14, ComponentLink4Description=https://datasheet.ciiva.com/22747/1018594-22747515.pdf?src-supplier=Element14, ComponentLink4URL=https://datasheet.ciiva.com/22747/1018594-22747515.pdf?src-supplier=Element14, ComponentLink5Description=https://datasheet.ciiva.com/2452/pyu-r-int-thick-7-2452609.pdf?src-supplier=Digi-Key, ComponentLink5URL=https://datasheet.ciiva.com/2452/pyu-r-int-thick-7-2452609.pdf?src-supplier=Digi-Key, ComponentLink6Description=https://datasheet.ciiva.com/2452/pyu-r-int-thick-7-2452610.pdf?src-supplier=Digi-Key, ComponentLink6URL=https://datasheet.ciiva.com/2452/pyu-r-int-thick-7-2452610.pdf?src-supplier=Digi-Key, ComponentLink7Description=https://datasheet.ciiva.com/8896/pyu-rc0402-51-rohs-l-6-8896201.pdf?src-supplier=Avnet, ComponentLink7URL=https://datasheet.ciiva.com/8896/pyu-rc0402-51-rohs-l-6-8896201.pdf?src-supplier=Avnet, ComponentLink8Description=https://datasheet.ciiva.com/15189/getdatasheetpartid-326379-15189533.pdf?src-supplier=Verical, ComponentLink8URL=https://datasheet.ciiva.com/15189/getdatasheetpartid-326379-15189533.pdf?src-supplier=Verical, Construction=Rectangular, Contact Plating=Tin,Matte, Depth=0.5mm, Features="Moisture Resistant", Height=0.016inch, Lead Free="Lead Free", Length=1mm, Military Standard=Not, Number of Terminations=2, Packaging="Tape and Reel", Pricing 1="1=0.10000, 10=0.01200, 25=0.00840, 50=0.00640, 100=0.00480, 250=0.00364, 500=0.00290, 1000=0.00214, 5000=0.00154 (USD)", Radiation Hardening=No, REACH SVHC=Unknown, RoHS=Yes, RoHS Compliant=Yes, Series=RC, Size Code=0402, Stock 1=45165868, Supplier 1=Digi-Key, Technology="THICK FILM", Termination=SMD/SMT, Tolerance=5%, Width=0.02inch
R2 R3: library part "RES 10K OHM 1% 1/8W 0402", "Res Thick Film 0402 10K Ohm 1% 0.125W(1/8W) ±100ppm/°C Pad SMD T/R", Case Code (Imperial)=0402, Case Code (Metric)=1005, Manufacturer="TE Connectivity", Manufacturer Part Number=CRGP0402F10K, Max Operating Temperature=155°C, Max Power Dissipation=125mW, Min Operating Temperature=-55°C, Resistance=10kR, Resistor Type="Thick Film", Supplier Part Number 1=A130367CT-ND, Temperature Coefficient=100ppm/°C, Tolerance=1%, Case/Package=0402, CATEGORY="Chip SMD Resistors", ComponentLink1Description=https://4donline.ihs.com/images/VipMasterIC/IC/TYEL/TYEL-S-A0005460475/TYEL-S-A0005460475-1.pdf?hkey=52A5661711E402568146F3353EA87419&src-supplier=Farnell, ComponentLink1URL=https://4donline.ihs.com/images/VipMasterIC/IC/TYEL/TYEL-S-A0005460475/TYEL-S-A0005460475-1.pdf?hkey=52A5661711E402568146F3353EA87419&src-supplier=Farnell, ComponentLink2Description=https://www.te.com/commerce/DocumentDelivery/DDEController?Action=srchrtrv&amp;DocNm=9-1773463-9&amp;DocType=DS&amp;DocLang=English&src-supplier=Digi-Key, ComponentLink2URL=https://www.te.com/commerce/DocumentDelivery/DDEController?Action=srchrtrv&amp;DocNm=9-1773463-9&amp;DocType=DS&amp;DocLang=English&src-supplier=Digi-Key, ComponentLink3Description=https://4donline.ihs.com/images/VipMasterIC/IC/TYEL/TYEL-S-A0005460475/TYEL-S-A0005460475-1.pdf?hkey=52A5661711E402568146F3353EA87419&src-supplier=Element14, ComponentLink3URL=https://4donline.ihs.com/images/VipMasterIC/IC/TYEL/TYEL-S-A0005460475/TYEL-S-A0005460475-1.pdf?hkey=52A5661711E402568146F3353EA87419&src-supplier=Element14, Number of Terminations=2, Packaging="Tape and Reel", Pricing 1="1=0.11000, 10=0.09700, 100=0.03730, 1000=0.01639, 2500=0.01416, 5000=0.01267 (USD)", RoHS=Yes, RoHS Compliant=Yes, Stock 1=486326, Supplier 1=Digi-Key
R4: library part "RES SMD 10 OHM 1% 1/4W 0603", "Res Surge Chip Thick Film 0603 10 Ohm 1% 1/4W ±200ppm/°C Molded Paper T/R", Manufacturer=Yageo, Manufacturer Part Number=SR0603FR-7T10RL, Supplier Part Number 1=YAG5824CT-ND, CATEGORY="Chip SMD Resistors", ComponentLink1Description=http://www.yageo.com/documents/recent/PYu-SR_D_F%20tol_RoHS_L_3.pdf?src-supplier=Digi-Key, ComponentLink1URL=http://www.yageo.com/documents/recent/PYu-SR_D_F%20tol_RoHS_L_3.pdf?src-supplier=Digi-Key, Pricing 1="1=0.75000, 10=0.55100, 100=0.32080, 1000=0.17992, 2500=0.17370 (USD)", RoHS=Yes, RoHS Compliant=Yes, Stock 1=13323, Supplier 1=Digi-Key
TP1 TP2 TP3 TP4 TP5 TP6 TP7 TP8 TP9 TP10 TP11: library part TP_1MM, "Test Point 1MM diameter"
U1: library part "IC NEO-M9N-00B", "GNSS module, Flash, TCXO, SAW, LNA, LCC, 12x16 mm Professional Grade", Manufacturer=u-blox, Supplier Part Number 1=672-NEO-M9N-00BCT-ND, CATEGORY="RF Receivers, Transceivers", Manufacturer Part Number=NEO-M9N-00B, Pricing 1="1=27.00000, 10=23.92000, 50=19.61000, 100=15.68010 (USD)", RoHS=Yes, RoHS Compliant=Yes, Stock 1=250, Supplier 1=Digi-Key

## Via types
v1: diameter 0.559, hole 0.33, L01-Top Layer to L04-Bottom Layer, tented both sides, 160 vias
v2: diameter 0.55, hole 0.3, L01-Top Layer to L04-Bottom Layer, tented both sides, 44 vias
v3: diameter 0.55, hole 0.33, L01-Top Layer to L04-Bottom Layer, 7 vias

## Nets (pads, with @x,y where several pads share a name; then routed paths per layer and width w, separated by ;. In a path a pad name is that pad's centre, name@x,y a point inside that pad or via, vN(x,y) a via of type N, cw(c..) or ccw(c..) an arc to the next point about the centre after c; other vN are vias at no path point)
+3V3: C1.2 C2.2 C3.2 J1.2 LED2.1 U1.22 U1.23 | length 24.1
  L01-Top Layer w0.508: C3.2 43.207,12.108 48.666,12.108 LED2.1 52.494,8.28 J1.2
+5V: J1.1 LED1.1 Q1.2 R6.2 | length 63.2
  L01-Top Layer w0.508: Q1.2@13.446,13.89 13.446,13.754 15.2,12 13.646,10.446 13.604,10.446 13.6,10.442 R6.2 ; 15.25,11.95 24.3,2.9 42.352,2.9 44.149,4.698 44.149,7.316 ; LED1.1 44.149,7.316 ; J1.1 61.022,8.28 60.724,7.982 60.724,7.582 60.458,7.316 44.149,7.316
D_SEL: R10.2 TP1.1 U1.2 | length 4.5
  L01-Top Layer w0.254: U1.2 TP1.1 38.027,25.227 38.077,25.227 38.2,25.35 R10.2
EXTIN: TP5.1 U1.4 | length 2.2
  L01-Top Layer w0.254: U1.4 TP5.1@34.4,23.8
GND: C1.1 C2.1 C3.1 C5.1 J1.8 J2.2 J2.3 R1.2 R2.1 R3.1 R9.2 R10.1 U1.10 U1.12 U1.13 U1.24 | length 2.8
  L01-Top Layer w0.508: v3(56,14.3) 56.02,14.28 J1.8
  other v1: 7.404,2.7 9.944,2.7 12.484,2.7 15.024,2.7 17.564,2.7 20.104,2.7 22.644,2.7 60.744,2.7 2.324,5.24 4.864,5.24 7.404,5.24 9.944,5.24 12.484,5.24 15.024,5.24 17.564,5.24 20.104,5.24 25.184,5.24 27.724,5.24 30.264,5.24 32.804,5.24 35.344,5.24 37.884,5.24 40.424,5.24 42.964,5.24 45.504,5.24 48.044,5.24 50.584,5.24 53.124,5.24 55.664,5.24 58.204,5.24 60.744,5.24 63.284,5.24 2.324,7.78 4.864,7.78 7.404,7.78 9.944,7.78 12.484,7.78 15.024,7.78 17.564,7.78 27.724,7.78 40.424,7.78 42.964,7.78 2.324,10.32 4.864,10.32 7.404,10.32 15.024,10.32 20.104,10.32 22.644,10.32 42.964,10.32 48.044,10.32 40.403,10.341 2.324,12.86 4.864,12.86 7.404,12.86 17.564,12.86 20.104,12.86 22.644,12.86 25.184,12.86 27.724,12.86 30.264,12.86 32.804,12.86 40.424,12.86 42.964,12.86 45.504,12.86 48.044,12.86 50.584,12.86 2.324,15.4 4.864,15.4 7.404,15.4 9.944,15.4 12.484,15.4 15.024,15.4 17.564,15.4 20.104,15.4 22.644,15.4 25.184,15.4 27.724,15.4 30.264,15.4 32.804,15.4 35.344,15.4 42.964,15.4 45.504,15.4 48.044,15.4 50.584,15.4 55.664,15.4 58.204,15.4 63.284,15.4 7.404,17.94 15.024,17.94 17.564,17.94 20.104,17.94 22.644,17.94 25.184,17.94 27.724,17.94 30.264,17.94 32.804,17.94 35.344,17.94 37.884,17.94 45.504,17.94 48.044,17.94 50.584,17.94 55.664,17.94 60.744,17.94 17.564,20.48 20.104,20.48 22.644,20.48 40.424,20.48 48.044,20.48 50.584,20.48 55.664,20.48 63.284,20.48 7.404,23.02 12.484,23.02 15.024,23.02 20.104,23.02 22.644,23.02 30.264,23.02 40.424,23.02 42.964,23.02 60.744,23.02 63.284,23.02 2.324,25.56 4.864,25.56 7.404,25.56 9.944,25.56 12.484,25.56 15.024,25.56 17.564,25.56 35.344,25.56 40.424,25.56 42.964,25.56 45.504,25.56 48.044,25.56 53.124,25.56 55.664,25.56 58.204,25.56 60.744,25.56 63.284,25.56 7.404,28.1 9.944,28.1 12.484,28.1 15.024,28.1 17.564,28.1 20.104,28.1 22.644,28.1 25.184,28.1 27.724,28.1 30.264,28.1 32.804,28.1 35.344,28.1 37.884,28.1 40.424,28.1 42.964,28.1 45.504,28.1 48.044,28.1 50.584,28.1 53.124,28.1 55.664,28.1 58.204,28.1 60.744,28.1
  other v2: 5.45,18.489 6.497,18.642 4.611,19.134 7.383,19.219 8.441,19.219 9.499,19.219 11.605,19.219 12.663,19.219 13.721,19.223 14.759,19.43 15.668,19.971 4.49,20.185 8.068,20.381 9.126,20.381 10.184,20.381 12.298,20.381 13.356,20.381 7.01,20.393 11.241,20.435 14.403,20.528 16.428,20.706 5.16,21.003 6.215,21.09 15.246,21.167 17.176,21.455 15.995,21.915 17.925,22.203 16.743,22.663 18.673,22.951 17.491,23.411 19.421,23.699 18.239,24.159 20.328,24.243 21.384,24.319 22.442,24.319 23.5,24.319 25.521,24.578 19.016,24.877 19.963,25.348 21.013,25.481 22.071,25.481 23.129,25.481 24.187,25.481 25.236,25.597
LNA_EN: R7.1 TP6.1 U1.14 | length 3.9
  L01-Top Layer w0.254: R7.1 TP6.1 ; TP6.1 U1.14
NetC5_2: C5.2 L1.1 R4.2 | length 3.5
  L01-Top Layer w0.508: L1.1 10.788,17.782 10.804,17.766 10.804,17.484 10.85,17.438 R4.2 C5.2@12.738,17.438
NetLED1_2: LED1.2 R2.2 | length 1.8
  L01-Top Layer w0.508: LED1.2 44.295,11.371 44.563,11.371 44.593,11.4 R2.2
NetLED2_2: LED2.2 R3.2 | length 1.8
  L01-Top Layer w0.508: LED2.2 51.195,11.371 51.463,11.371 51.493,11.4 R3.2
NetQ1_1: Q1.1 R6.1 R7.2 R9.1 | length 20.4
  L01-Top Layer w0.254: Q1.1 12.858,12.085 12.705,12.237 12.705,12.795 12.103,13.397 12.103,14.516 12.365,14.777 14.035,14.777 21.612,7.2 R7.2
  L01-Top Layer w0.508: R9.1 R6.1 12.6,11.4 12.687,11.487 12.687,12.06 Q1.1@13.078,12.06
NetQ1_3: Q1.3 R4.1 | length 2.9
  L01-Top Layer w0.508: Q1.3@11,13 R4.1
RF_ANT: C4.1 J2.1 L1.2 | length 20.9
  L01-Top Layer w0.178: J2.1 13.649,19.8 ccw(c13.649,22.34) 15.445,20.544 19.057,24.156 cw(c20.853,22.36) 20.853,24.9 C4.1
RF_MODULE: C4.2 U1.11 | length 2.3
  L01-Top Layer w0.178: U1.11 C4.2
RST_GPS: J1.4 U1.8 | length 48.9
  L01-Top Layer w0.254: U1.8 28.1,26.7 28.6,27.2 49.297,27.2 v3(52.297,24.2) ; v3(52.3,20.804) 52.3,14.1 v3(56.1,10.3) 58.775,10.3 J1.4
  L04-Bottom Layer w0.254: v3(52.297,24.2) 52.298,24.198 52.298,20.806 v3(52.3,20.804)
RX_GPS: R5.1 TP10.1 U1.21 | length 31.2
  L01-Top Layer w0.254: U1.21 34.673,9.673 34.673,10.373 45.9,21.6 TP10.1 R5.1
RX_GPS_CONN: J1.5 R5.2 | length 9.3
  L01-Top Layer w0.254: R5.2 58.506,17.794 61.1,15.2 61.1,13.6 J1.5@62.124,12.576
  L01-Top Layer w0.508: J1.5@62.124,12.576 62.124,12.536 62.38,12.28 J1.5
SAFEBOOT_N: TP7.1 U1.1 | length 2.4
  L01-Top Layer w0.254: U1.1 37.699,23.278 38.2,23.779 TP7.1
SCL_SPI_CLK: TP9.1 U1.19 | length 2.2
  L01-Top Layer w0.254: TP9.1 U1.19
SDA_SPI_CS_N: TP8.1 U1.18 | length 2.4
  L01-Top Layer w0.254: TP8.1 31.1,7.8 U1.18
TP1: J1.6 U1.3 | length 38.1
  L01-Top Layer w0.254: U1.3 35.5,24.6 37.6,26.7 48.1,26.7 51.361,23.439 53.35,23.439 53.52,23.269 v3(53.6,23.269) ; v3(53.6,20.8) 53.6,14.8 v3(56.1,12.3) 56.12,12.28 J1.6
  L04-Bottom Layer w0.254: v3(53.6,20.8) v3(53.6,23.269)
TX_GPS: R8.1 TP11.1 U1.20 | length 35.7
  L01-Top Layer w0.254: U1.20 33.515,9.615 33.515,10.515 45.427,22.427 60.373,22.427 61.061,21.739 R8.1
TX_GPS_CONN: J1.3 R8.2 | length 13.1
  L01-Top Layer w0.254: R8.2 62.1,19 65.6,15.5 65.6,10.834 65.302,10.536 J1.3@63.601,10.536
  L01-Top Layer w0.508: J1.3 J1.3@63.601,10.536
USB_DM: TP2.1 U1.5 | length 3.7
  L01-Top Layer w0.254: U1.5 TP2.1
USB_DP: TP3.1 U1.6 | length 2.2
  L01-Top Layer w0.254: TP3.1@32.1,23.715 32.2,23.615 U1.6
VDD_USB: R1.1 TP4.1 U1.7 | length 6.2
  L01-Top Layer w0.254: R1.1 29.423,23.923 29.723,23.923 TP4.1 ; TP4.1@30.873,25.3 30.873,25.098 30.885,25.085 31.1,24.871 U1.7
pads on no net: J1.7 U1.9 U1.15 U1.16 U1.17

## Polygon pours and split planes (outlines as drawn)
no net on Top Solder "NONET_L-01_P-001" (solid): 0.3,24.876 0.3,30.685 cw(c1.062,30.684) 1.062,31.446 6.84,31.446 6.84,26.981 cw(c4.508,27.22) 4.508,24.876
no net on Top Solder "NONET_L-01_P-001" (solid): 59.341,26.682 ccw(c61.229,26.764) 61.229,24.875 66.871,24.875 66.871,30.751 ccw(c66.108,30.678) 66.108,31.445 59.341,31.445
no net on Top Solder (solid): 59.341,0.296 59.341,5.191 cw(c61.106,5.099) 61.106,6.866 66.871,6.866 66.871,1.004 cw(c66.102,1.068) 66.102,0.296
no net on Top Solder "NONET_L-01_P-001" (solid): 1.066,0.296 cw(c1.066,1.062) 0.301,1.025 0.301,6.866 5.501,6.866 cw(c5.501,5.524) 6.841,5.601 6.841,0.296
no net on Bottom Solder (solid): 59.341,0.296 59.341,5.191 cw(c61.106,5.099) 61.106,6.866 66.871,6.866 66.871,1.004 cw(c66.102,1.068) 66.102,0.296
no net on Bottom Solder "NONET_L-01_P-001" (solid): 59.341,26.683 ccw(c61.229,26.766) 61.229,24.876 66.871,24.876 66.871,30.753 ccw(c66.108,30.679) 66.108,31.446 59.341,31.446
no net on Bottom Solder "NONET_L-01_P-001" (solid): 0.297,24.879 0.297,30.688 cw(c1.059,30.687) 1.059,31.449 6.837,31.449 6.837,26.984 cw(c4.505,27.223) 4.505,24.879
no net on Bottom Solder "NONET_L-01_P-001" (solid): 1.066,0.296 cw(c1.066,1.062) 0.301,1.025 0.301,6.866 5.501,6.866 cw(c5.501,5.524) 6.841,5.601 6.841,0.296
+3V3 on L01-Top Layer "+3V3_L01_P002" (solid, pour order 2): 37,10.3 37,8 38.7,8 38.7,6.9 34.9,6.9 34.9,10.3 35.2,10.3
GND on L01-Top Layer "GND_L01_P005" (solid, remove dead copper, pour order 5): 1.045,0 cw(c1.045,1.045) 0,1.045 -0.002,30.676 cw(c1.069,30.676) 1.068,31.747 66.094,31.749 cw(c66.094,30.669) 67.174,30.67 67.171,1.015 cw(c66.152,1.015) 66.153,-0.004
GND on L02-Inner Layer "GND_L02_P000" (solid, pour order 0): 0,1.045 ccw(c1.045,1.045) 1.045,0 66.153,-0.004 ccw(c66.152,1.015) 67.171,1.015 67.174,30.67 ccw(c66.094,30.669) 66.094,31.749 1.068,31.747 ccw(c1.069,30.676) -0.002,30.676
GND on L04-Bottom Layer "GND_L04_P001" (solid, pour order 1): 1.045,0 cw(c1.045,1.045) 0,1.045 -0.002,30.676 cw(c1.069,30.676) 1.068,31.747 66.094,31.749 cw(c66.094,30.669) 67.174,30.67 67.171,1.015 cw(c66.152,1.015) 66.153,-0.004
GND on L03-Inner Layer "GND_L03_P004" (solid, pour order 4): 1.045,0 cw(c1.045,1.045) 0,1.045 -0.002,30.676 cw(c1.069,30.676) 1.068,31.747 66.094,31.749 cw(c66.094,30.669) 67.174,30.67 67.171,1.015 cw(c66.152,1.015) 66.153,-0.004

## Keep-outs
Keep-Out Layer:
  the board outline again, w0.013

## Other copper
L01-Top Layer:
  pour cut-out: 158 vertices and 0 holes, not listed, extent 4.716,18.725 25.25,25.349

## Silkscreen, mask and mechanical layers (free items; w line width, h text height)
Top Overlay:
  rectangle: 7.4,0.7 21.5,5
  text "NEO-M9N MODULE V1" at 43.8,1.3 h1.5
Bottom Overlay:
  drawing of 28 lines, arcs and shapes, not listed
M01_PCB_Outline:
  circle w0.013: c63.351,28.896 r1.55
  circle w0.013: c2.851,2.896 r1.55
  circle w0.013: c63.351,2.896 r1.55
  circle w0.013: c2.851,28.896 r1.55
  pour cut-out: 61.801,2.896 ccw(c63.351,2.896) 63.351,1.346 ccw(c63.351,2.896) 64.901,2.896 ccw(c63.351,2.896) 63.351,4.446 ccw(c63.351,2.896)
  lines w0.013: -0.379,0 1.045,0 ; 0,-0.256 0,1.045 ; 0.302,1.025 ccw(c1.067,1.062) 1.067,0.296 ; 0.302,1.025 ccw(c1.067,1.062) 1.067,0.296 ; 0.302,1.025 0.302,6.866 ; 0.302,1.025 0.302,6.866 ; 0.302,6.866 5.502,6.866 ; 0.302,6.866 5.502,6.866 ; 1.067,0.296 6.842,0.296 ; 1.067,0.296 6.842,0.296 ; 5.502,6.866 cw(c5.502,5.524) 6.842,5.601 ; 5.502,6.866 cw(c5.502,5.524) 6.842,5.601 ; 6.842,0.296 6.842,5.601 ; 6.842,0.296 6.842,5.601 ; 0.301,24.876 0.301,30.685 cw(c1.063,30.684) 1.063,31.446 6.841,31.446 6.841,26.981 cw(c4.509,27.22) 4.509,24.876 0.301,24.876 ; 59.341,26.683 ccw(c61.229,26.766) 61.229,24.876 66.871,24.876 66.871,30.753 ccw(c66.108,30.679) 66.108,31.446 59.341,31.446 59.341,26.683